# EAGLE board SPARK PCB (EAGLE 9.7.0)
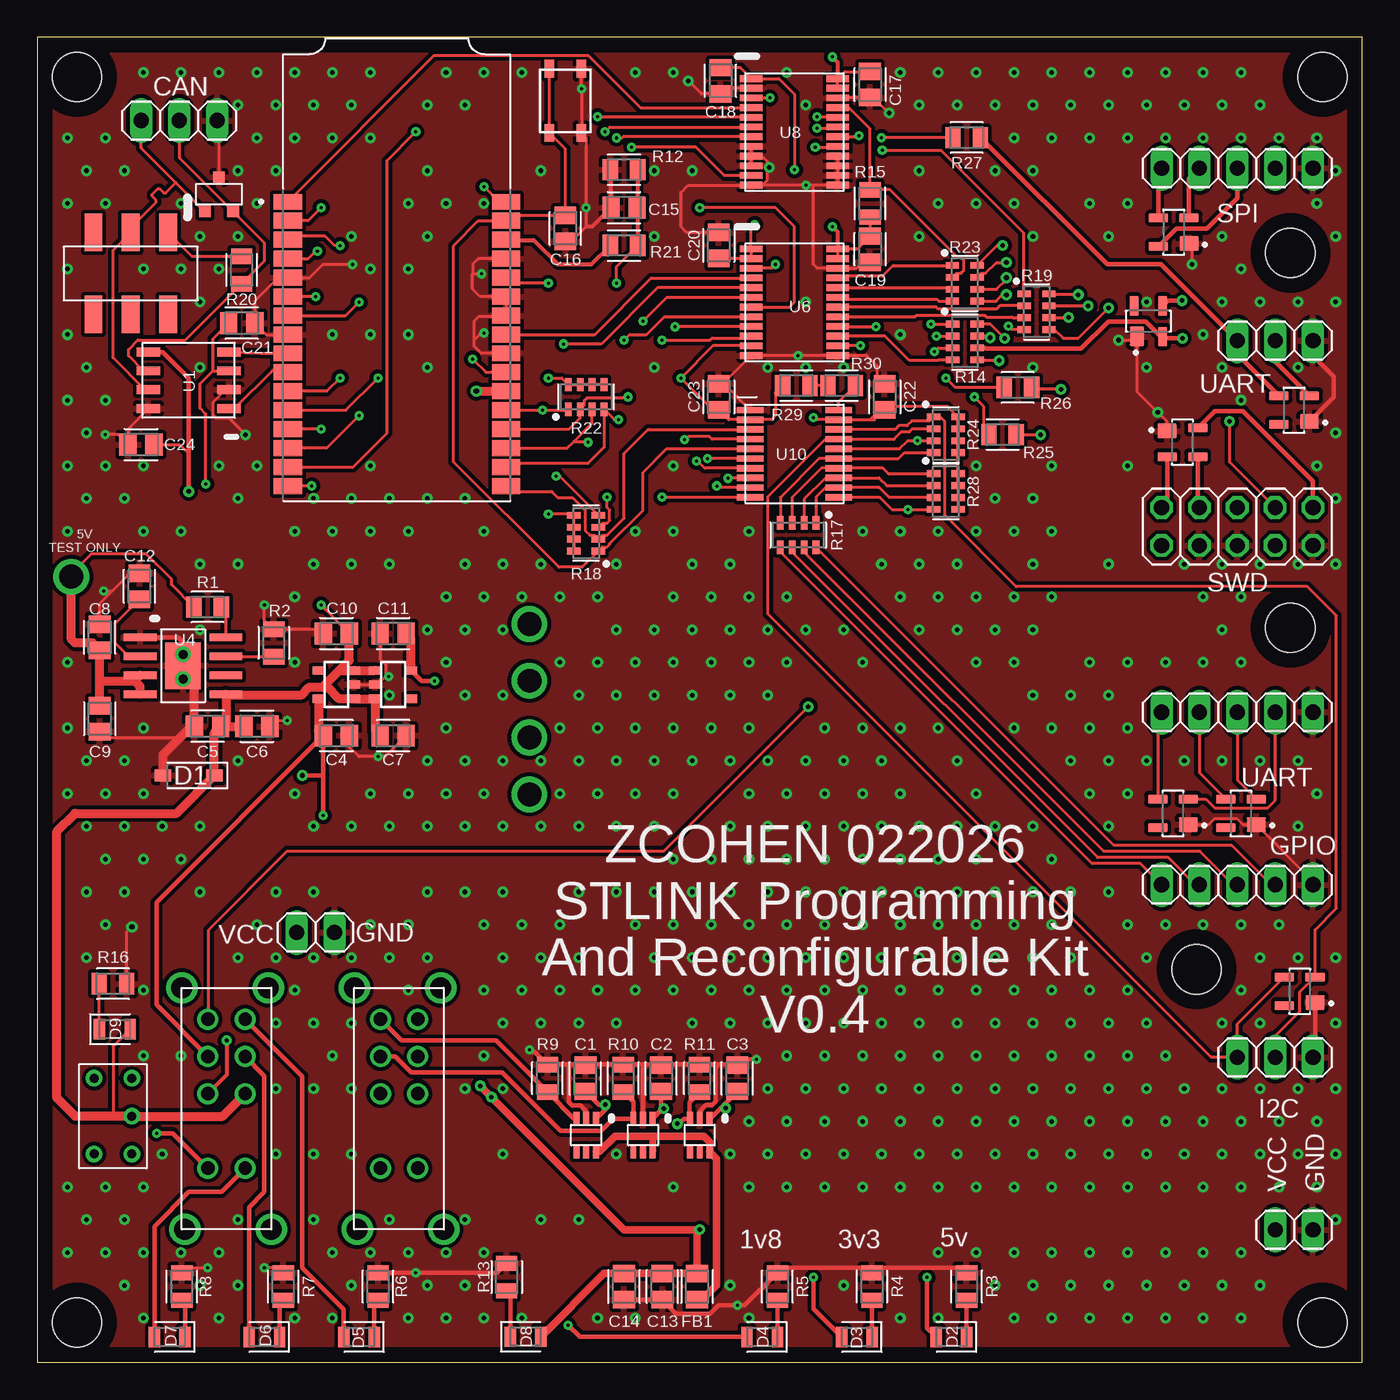
[diagram p0: board, top side]
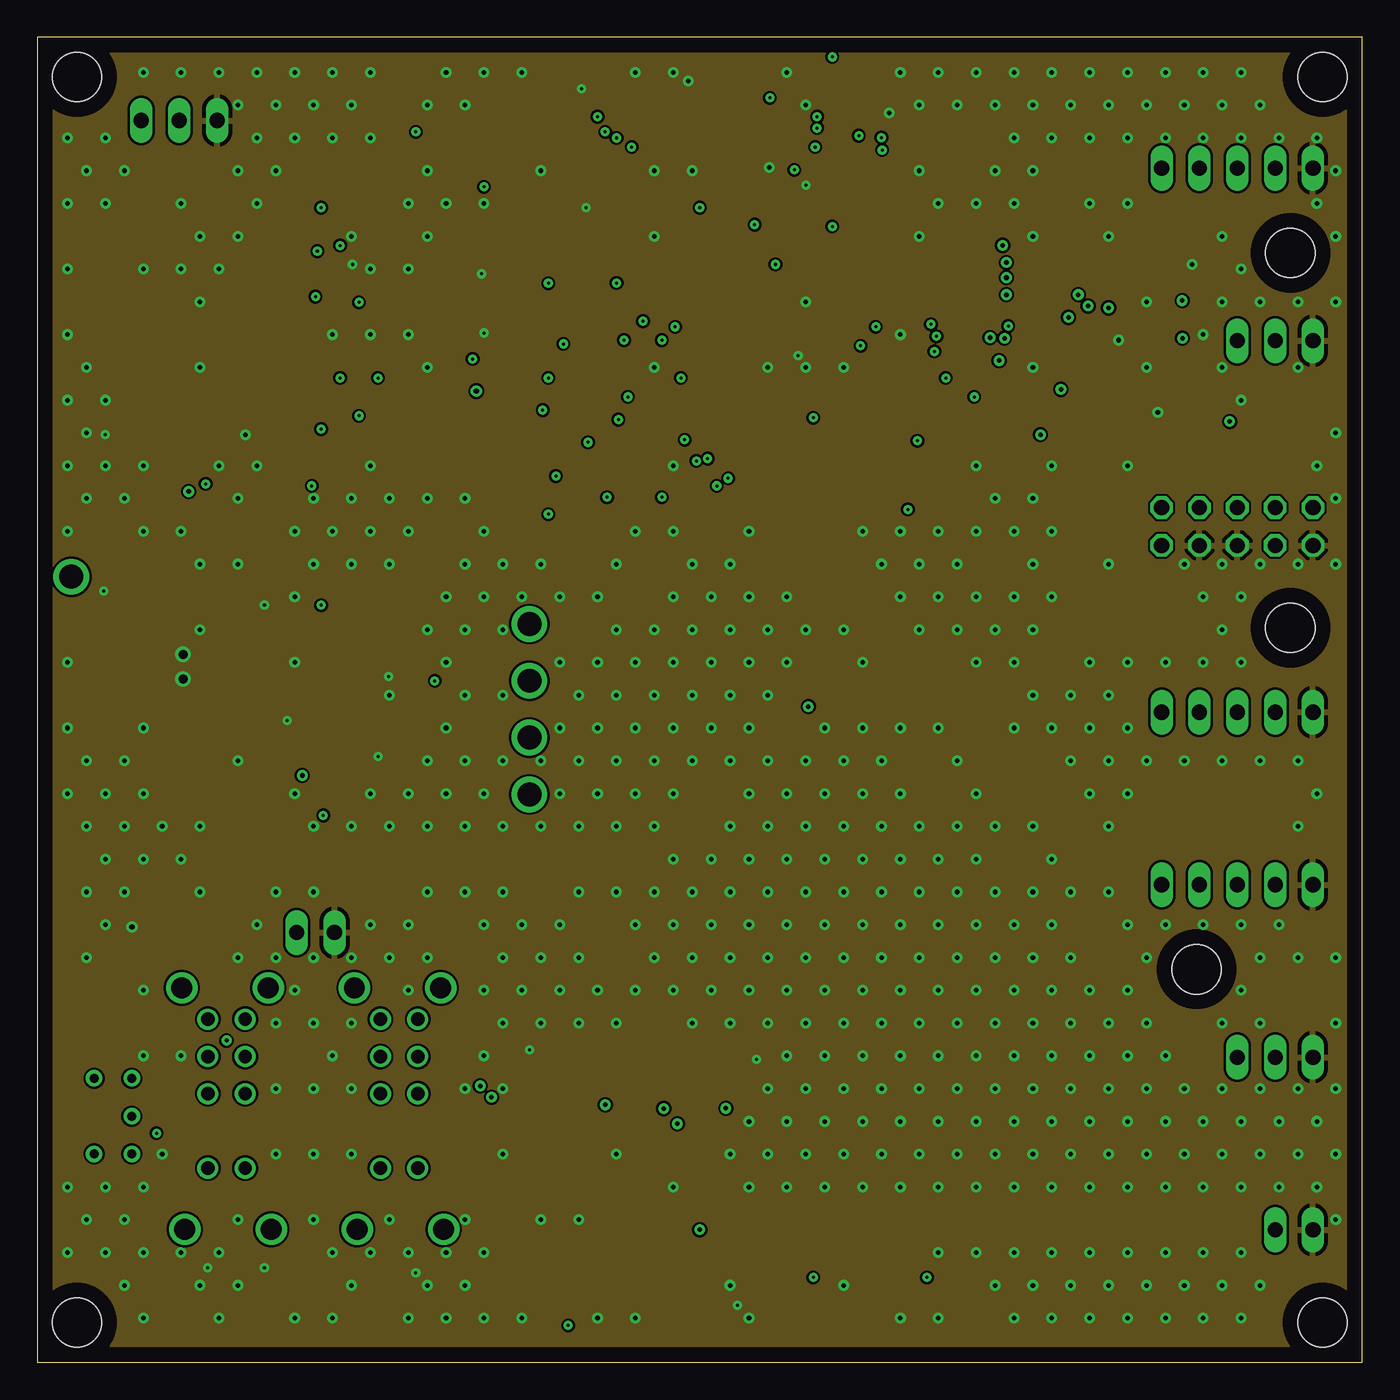
[diagram p1: board, inner layer Route2]
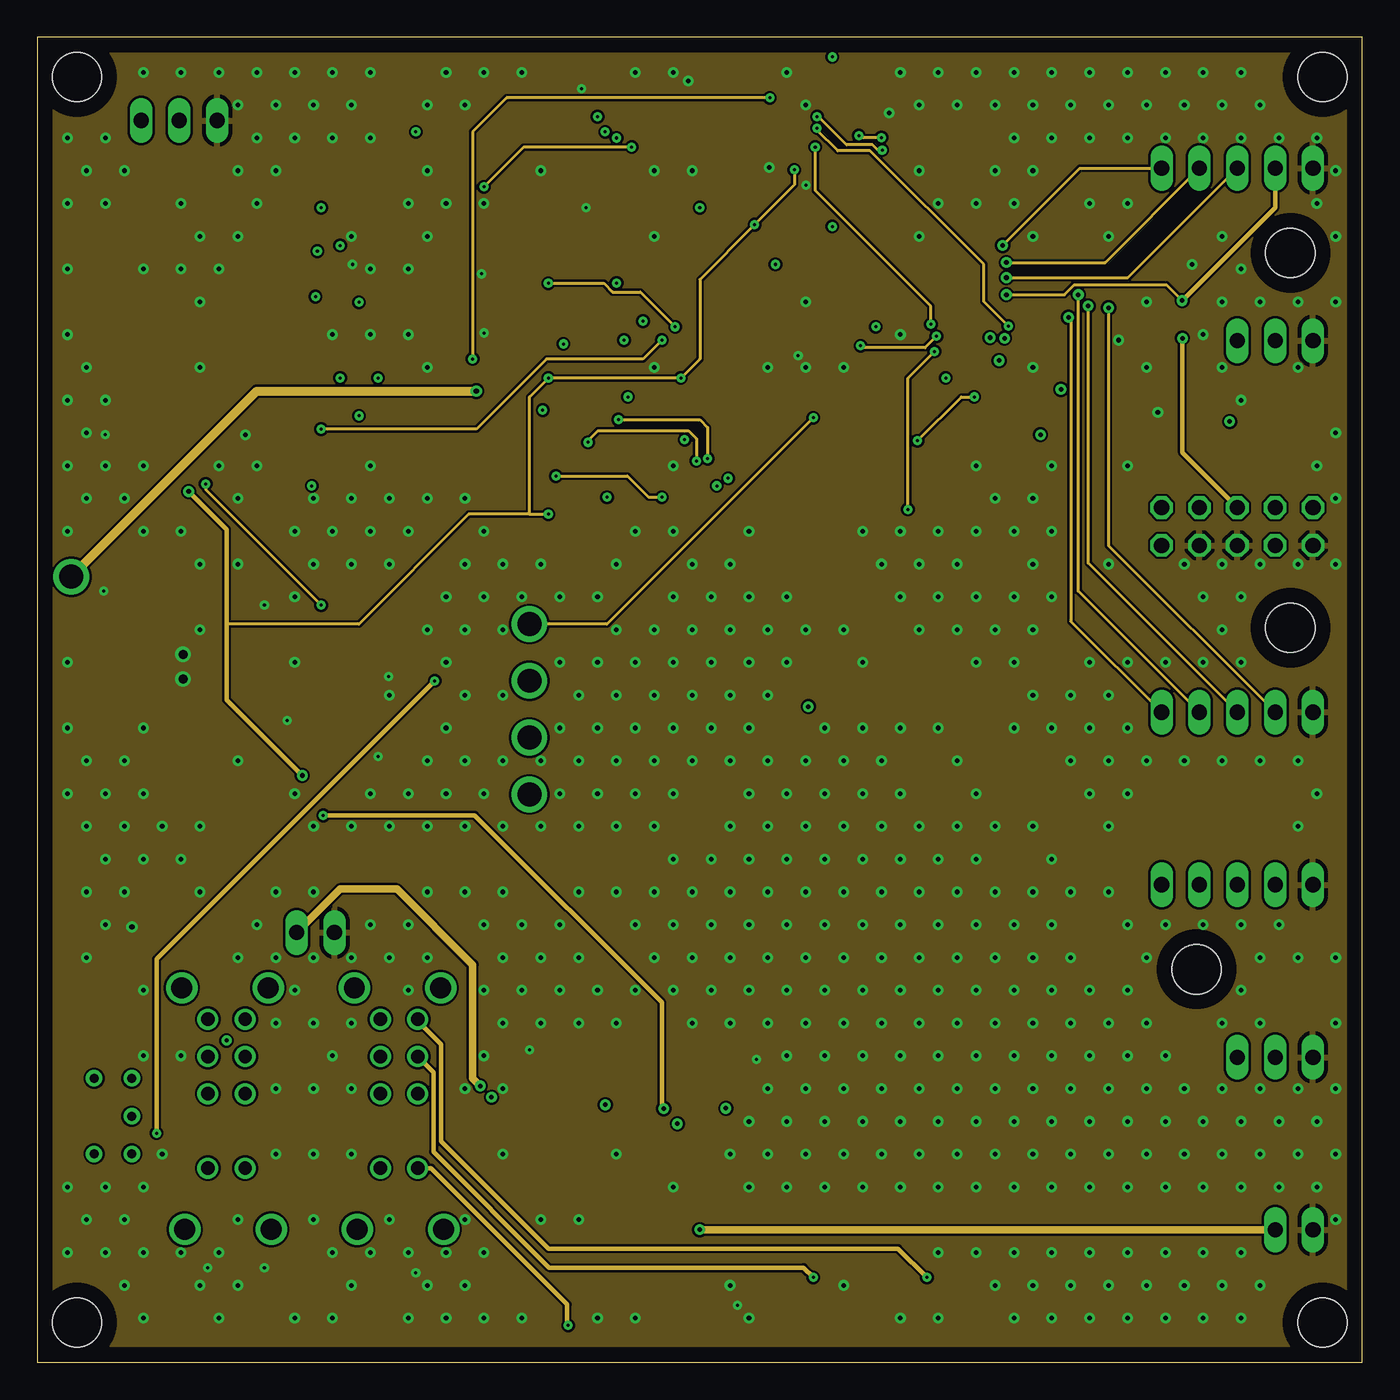
[diagram p2: board, inner layer Route63]
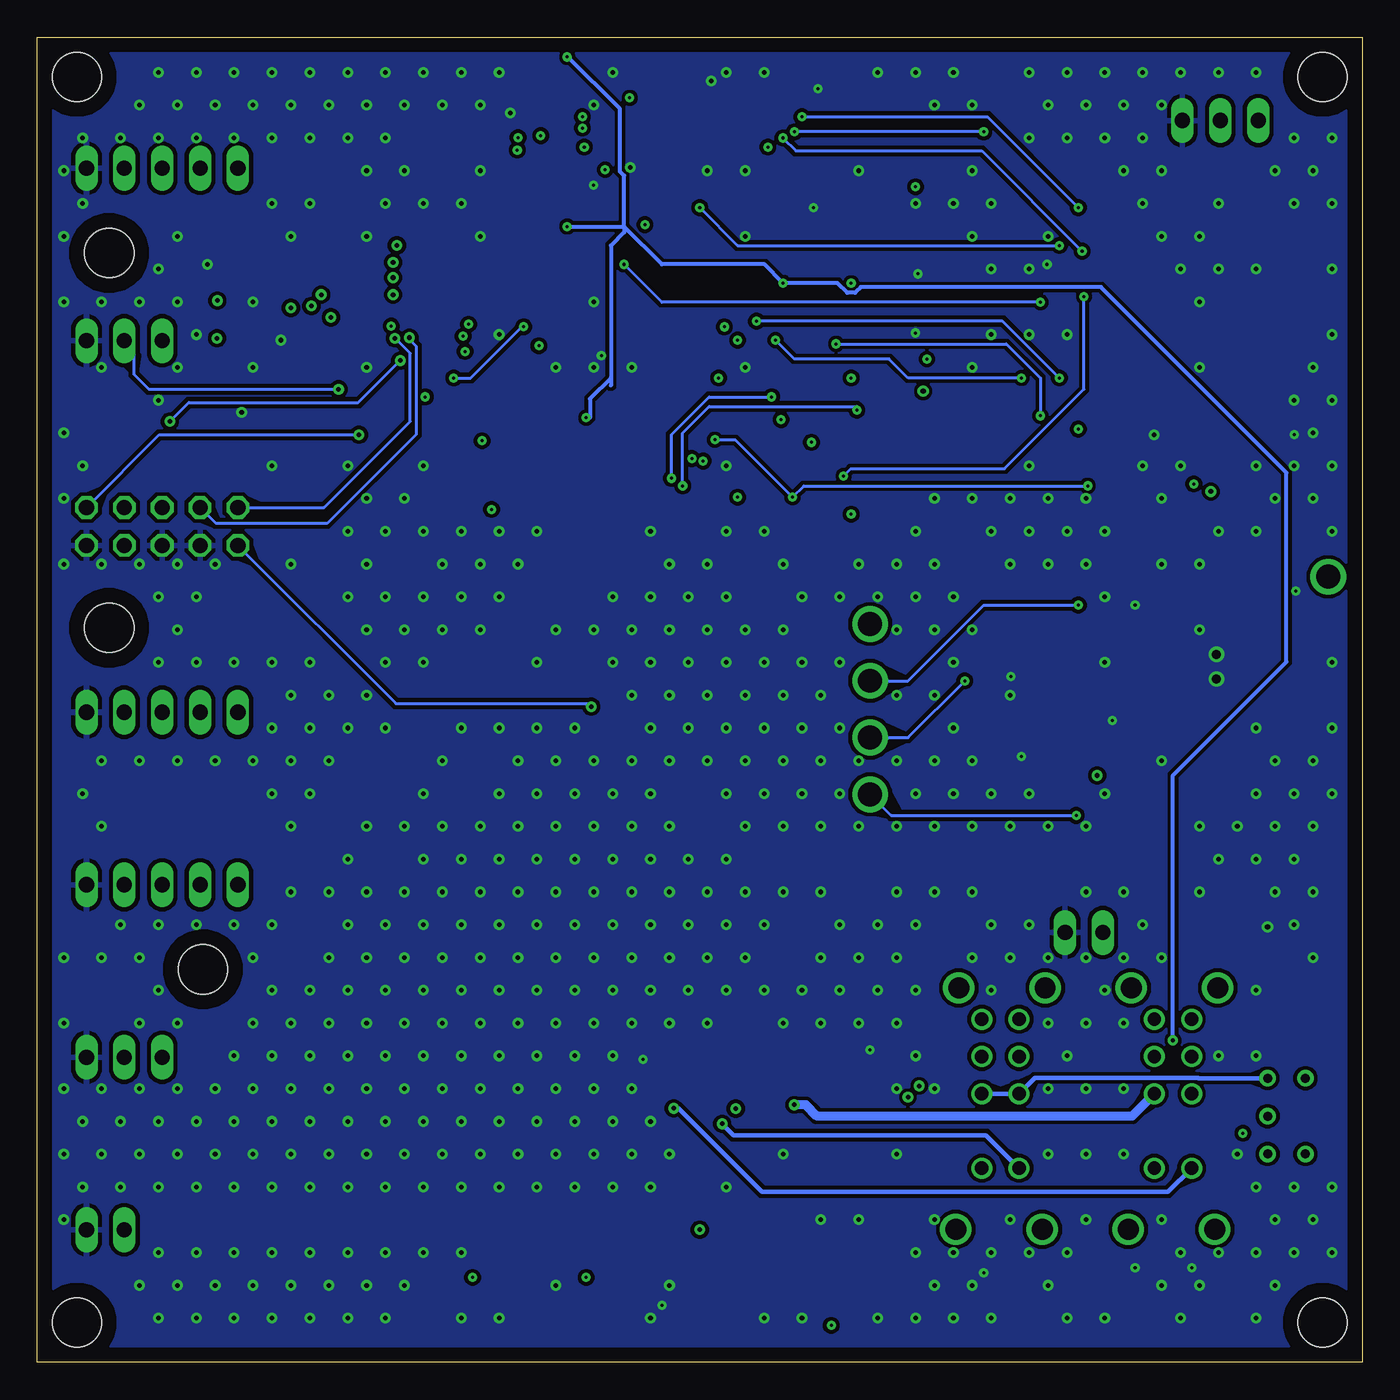
[diagram p3: board, bottom side, seen from below]

Size 88.9 x 88.9 mm. Coordinates in mm from the lower left corner, seen from the top.
Outline: 0,0 88.9,0 88.9,88.9 0,88.9 0,0
Copper layers (1+2*15+16): Top / Route2 / Route63 / Bottom
Stack-up 4 Layer Stack: Top SilkScreen Epoxy Ink / Top SolderMask SR:Green 0.0254mm Dk 4.3 / Top Surface Finish Lead-Free 0.02mm / Top CuFoil:007 0.035mm / Dielectric-1 Prepreg:001 0.064mm / Dielectric-2 Prepreg:001 0.064mm / Route2 CuFoil:007 0.035mm / Dielectric-3 Core:066 0.711mm / Route63 CuFoil:007 0.035mm / Dielectric-4 Prepreg:001 0.064mm / Dielectric-5 Prepreg:001 0.064mm / Bottom CuFoil:007 0.035mm / Bottom Surface Finish Lead-Free 0.02mm / Bottom SolderMask SR:Green 0.0254mm Dk 4.3 / Bottom SilkScreen Epoxy Ink
Design rules: minimum copper width all 6mil, minimum copper width 6mil, minimum drill size 6mil, copper clearance wire_polygon to wire_polygon 6mil, copper clearance wire_polygon to pad_smd 6mil, copper clearance wire_polygon to via 6mil, copper clearance pad_smd to pad_smd 6mil, copper clearance pad_smd to via 6mil, copper clearance via to via 6mil, copper clearance smd to pad (same net) 6mil, copper clearance smd to via (same net) 6mil, copper clearance smd to smd (same net) 6mil, dimension clearance 40mil, via restrict clearance 0mil, restrict clearance 0mil, drill distance 6mil, keepout clearance 0mil
Holes 3.3 mm at 2.67,86.23 86.23,86.23 2.67,2.67 86.23,2.67 84.07,74.42 84.07,49.28 77.79,26.36

## Footprints (pad centres in the part's own frame; a part is rotated, then mirrored left to right if it is on the bottom)
CAPC2012X110 = smd 1.165 x 1.465: 1 -0.875,0; 2 0.875,0
SOD3715X135 = smd 1.127 x 0.784: 1 -1.722,0; 2 1.722,0
LEDC2012X110N_FLAT-R = smd 0.762 x 1.362: A 1.025,0; C -1.025,0
LEDC2012X110N_FLAT-G = smd 0.762 x 1.362: A 1.025,0; C -1.025,0
BEADC2012X105N = smd 1.165 x 1.465: 1 -0.875,0; 2 0.875,0
1X03 = drill 1.016 long: 1 -2.54,0; 2 0,0; 3 2.54,0
2X05 = drill 1.016 octagon: 1 -5.08,-1.27; 2 -5.08,1.27; 3 -2.54,-1.27; 4 -2.54,1.27; 5 0,-1.27; 6 0,1.27; 7 2.54,-1.27; 8 2.54,1.27; 9 5.08,-1.27; 10 5.08,1.27
1X05 = drill 1.016 long: 1 -5.08,0; 2 -2.54,0; 3 0,0; 4 2.54,0; 5 5.08,0
1X02 = drill 1.016 long: 1 -1.27,0; 2 1.27,0
RESC2012X65 = smd 1.031 x 1.42: 1 -0.919,0; 2 0.919,0
CAY16-220J4LF = smd 0.9 x 0.45: 1 -0.825,1.2; 2 -0.825,0.4; 3 -0.825,-0.4; 4 -0.825,-1.2; 5 0.825,-1.2; 6 0.825,-0.4; 7 0.825,0.4; 8 0.825,1.2
JS202011SCQN = smd 1.2 x 2.5: 1 -2.5,-2.75; 2 0,-2.75; 3 2.5,-2.75; 4 -2.5,2.75; 5 0,2.75; 6 2.5,2.75
TCAN1051HGVDR = smd 1.55 x 0.6: CANH 2.7,0.635; CANL 2.7,-0.635; GND -2.7,0.635; RXD -2.7,-1.905; S 2.7,1.905; TXD -2.7,1.905; VCC -2.7,-0.635; VIO 2.7,-1.905
TPS22919DCKR = smd 0.9 x 0.4: GND -1.1,0; IN -1.1,0.65; NC 1.1,-0.65; ON -1.1,-0.65; OUT 1.1,0.65; QOD 1.1,0
TPS259620DDAR = smd 2.2 x 0.5: DVDT -2.875,0.635; EN -2.875,-0.635; FLT 2.875,-0.635; GND -2.875,1.905; ILM 2.875,0.635; IN -2.875,-1.905; OUT 2.875,-1.905; OVLO 2.875,1.905 | smd 2.4 x 3.1: GND1 0,0
SN74AXC8T245PWR = smd 1.5 x 0.45: A1 -2.9,2.275; A2 -2.9,1.625; A3 -2.9,0.975; A4 -2.9,0.325; A5 -2.9,-0.325; A6 -2.9,-0.975; A7 -2.9,-1.625; A8 -2.9,-2.275; B1 2.9,1.625; B2 2.9,0.975; B3 2.9,0.325; B4 2.9,-0.325; B5 2.9,-0.975; B6 2.9,-1.625; B7 2.9,-2.275; B8 2.9,-2.925; DIR1 -2.9,2.925; DIR2 -2.9,-2.925; GND -2.9,-3.575; GND2 2.9,-3.575; OE 2.9,2.275; VCCA -2.9,3.575; VCCB 2.9,2.925; VCCB1 2.9,3.575
STLINK-V3MODS = smd 1.9 x 1.07: 1 -7.32,6.604; 2 -7.32,5.334; 3 -7.32,4.064; 4 -7.32,2.794; 5 -7.32,1.524; 6 -7.32,0.254; 7 -7.32,-1.016; 8 -7.32,-2.286; 9 -7.32,-3.556; 10 -7.32,-4.826; 11 -7.32,-6.096; 12 -7.32,-7.366; 13 -7.32,-8.636; 14 -7.32,-9.906; 15 -7.32,-11.176; 16 -7.32,-12.446; 17 7.32,-12.446; 18 7.32,-11.176; 19 7.32,-9.906; 20 7.32,-8.636; 21 7.32,-7.366; 22 7.32,-6.096; 23 7.32,-4.826; 24 7.32,-3.556; 25 7.32,-2.286; 26 7.32,-1.016; 27 7.32,0.254; 28 7.32,1.524; 29 7.32,2.794; 30 7.32,4.064; 31 7.32,5.334; 32 7.32,6.604
LSF0108PW-Q100J = smd 1.78 x 0.42: A1 -2.97,1.625; A2 -2.97,0.975; A3 -2.97,0.325; A4 -2.97,-0.325; A5 -2.97,-0.975; A6 -2.97,-1.625; A7 -2.97,-2.275; A8 -2.97,-2.925; B1 2.97,1.625; B2 2.97,0.975; B3 2.97,0.325; B4 2.97,-0.325; B5 2.97,-0.975; B6 2.97,-1.625; B7 2.97,-2.275; B8 2.97,-2.925; EN 2.97,2.925; GND -2.97,2.925; REFA -2.97,2.275; REFB 2.97,2.275
GW12RCP = drill 0.6: 1 2.54,-1.27; 2 -2.54,-1.27; 4 2.54,1.27; 5 0,1.27; 6 -2.54,1.27
OS203012MU5QP1 = drill 0.9: 1 -5,1.25; 2 0,1.25; 3 2.5,1.25; 4 5,1.25; 5 -5,-1.25; 6 0,-1.25; 7 2.5,-1.25; 8 5,-1.25 | drill 1.4: P$9 -9.1,2.8; P$10 7.1,-2.8; P$11 -9.1,-3; P$12 7.1,3
AP2112K = smd 0.55 x 0.8: P$1 0.95,1.2; P$2 0,1.2; P$3 -0.95,1.2; P$4 -0.95,-1.2; P$5 0.95,-1.2
TACTILE_SWITCH = smd 1.2 x 0.65: P$1 -2.15,1.075; P$2 -2.15,-1.075; P$3 2.15,1.075; P$4 2.15,-1.075
SP0503BAHTG = smd 0.99 x 1.3: 1 -0.76,-1.025 | smd 0.59 x 1.3: 2 0.96,-1.025; 3 0.96,1.025; 4 -0.96,1.025
5011TESTPOINT = drill 1.6: P$1 0,0
SM24CANB-02HTG = smd 0.78 x 0.78: P1H -0.95,-1.145; P2L 0.95,-1.145; P3G 0,1.145

## Placement (x,y rotation side)
C1  .1uF  [CAPC2012X110]  36.78,19.05 270 top
C2  .1uF  [CAPC2012X110]  41.86,19.05 270 top
C3  .1uF  [CAPC2012X110]  46.97,19.05 270 top
C4  1uF  [CAPC2012X110]  20.07,42.04 0 top
C5  10uF  [CAPC2012X110]  11.43,42.67 0 top
C6  .1uF  [CAPC2012X110]  14.73,42.67 180 top
C7  1uF  [CAPC2012X110]  23.88,42.04 0 top
C8  .1uF  [CAPC2012X110]  4.19,48.64 270 top
C9  10uF  [CAPC2012X110]  4.19,43.18 90 top
C10  1uF  [CAPC2012X110]  20.07,48.9 180 top
C11  1uF  [CAPC2012X110]  23.88,48.9 180 top
C12  2.2nF  [CAPC2012X110]  6.86,52.07 270 top
C13  10uF  [CAPC2012X110]  41.94,5.08 270 top
C14  .1uF  [CAPC2012X110]  39.37,5.08 270 top
C15  .1uF  [CAPC2012X110]  39.37,77.47 180 top
C16  .1uF  [CAPC2012X110]  35.43,76.07 270 top
C17  .1uF  [CAPC2012X110]  55.88,85.72 270 top
C18  .1uF  [CAPC2012X110]  45.85,85.98 270 top
C19  .1uF  [CAPC2012X110]  55.88,74.68 270 top
C20  .1uF  [CAPC2012X110]  45.72,74.93 90 top
C21  .1uF  [CAPC2012X110]  13.72,69.72 0 top
C22  .1uF  [CAPC2012X110]  56.85,64.77 90 top
C23  .1uF  [CAPC2012X110]  45.72,64.77 90 top
C24  .1uF  [CAPC2012X110]  6.96,61.57 180 top
D1  SMF5.0A  [SOD3715X135]  10.16,39.37 180 top
D2  5v_LED  [LEDC2012X110N_FLAT-R]  61.34,1.7 180 top
D3  3v3_LED  [LEDC2012X110N_FLAT-R]  54.99,1.7 180 top
D4  1v8_LED  [LEDC2012X110N_FLAT-R]  48.64,1.7 180 top
D5  VCC_SENSE  [LEDC2012X110N_FLAT-R]  21.59,1.7 180 top
D6  3v3_LED  [LEDC2012X110N_FLAT-R]  15.24,1.7 180 top
D7  1v8_LED  [LEDC2012X110N_FLAT-R]  8.89,1.7 180 top
D8  VCC  [LEDC2012X110N_FLAT-G]  32.77,1.71 0 top
D9  PWR  [LEDC2012X110N_FLAT-G]  5.21,22.35 0 top
FB1  100R  [BEADC2012X105N]  44.27,5.08 90 top
JP1  CAN  [1X03]  9.53,83.31 0 top
JP2  SWD  [2X05]  80.52,56.07 0 top
JP3  SPI  [1X05]  80.52,80.11 0 top
JP4  GPIO  [1X05]  80.52,32.04 0 top
JP5  I2C  [1X03]  83.06,20.46 0 top
JP6  UART2  [1X05]  80.52,43.61 0 top
JP7  VCC  [1X02]  84.33,8.89 0 top
JP8  UART  [1X03]  83.06,68.54 0 top
JP9  VCC  [1X02]  18.67,28.83 0 top
R1  10k  [RESC2012X65]  11.43,50.67 0 top
R2  3k  [RESC2012X65]  15.88,48.26 90 top
R3  1k  [RESC2012X65]  62.36,5.08 270 top
R4  1k  [RESC2012X65]  56.01,5.08 270 top
R5  1k  [RESC2012X65]  49.66,5.08 270 top
R6  1k  [RESC2012X65]  22.86,5.08 270 top
R7  1k  [RESC2012X65]  16.51,5.08 270 top
R8  1k  [RESC2012X65]  9.7,5.08 270 top
R9  100k  [RESC2012X65]  34.23,19.05 270 top
R10  100k  [RESC2012X65]  39.32,19.05 270 top
R11  100k  [RESC2012X65]  44.43,19.05 270 top
R12  100k  [RESC2012X65]  39.37,80.01 0 top
R13  1k  [RESC2012X65]  31.5,5.71 90 top
R14  22R  [CAY16-220J4LF]  62.24,68.45 0 top
R15  10k  [RESC2012X65]  55.88,77.75 270 top
R16  1k  [RESC2012X65]  5.08,25.4 0 top
R17  22R  [CAY16-220J4LF]  51.05,55.5 270 top
R18  10k  [CAY16-220J4LF]  36.83,55.63 180 top
R19  22R  [CAY16-220J4LF]  67.05,70.48 0 top
R20  120  [RESC2012X65]  13.72,73.28 270 top
R21  220  [RESC2012X65]  39.37,74.93 180 top
R22  10k  [CAY16-220J4LF]  36.83,64.77 90 top
R23  22R  [CAY16-220J4LF]  62.23,72.39 0 top
R24  10k  [CAY16-220J4LF]  60.96,62.23 0 top
R25  22R  [RESC2012X65]  64.77,62.23 0 top
R26  22R  [RESC2012X65]  65.79,65.41 0 top
R27  22R  [RESC2012X65]  62.36,82.17 0 top
R28  10k  [CAY16-220J4LF]  60.96,58.42 0 top
R29  100k  [RESC2012X65]  50.93,65.53 180 top
R30  100k  [RESC2012X65]  53.98,65.53 180 top
S1  JS202011SCQN  [JS202011SCQN]  6.27,73.05 180 top
U1  TCAN1051HGVDRTCAN1051HGVDR  [TCAN1051HGVDR]  10.16,65.88 180 top
U2  5v  [TPS22919DCKR]  36.83,15.24 270 top
U3  3v3  [TPS22919DCKR]  40.64,15.24 270 top
U4  TPS259620DDAR  [TPS259620DDAR]  9.78,46.74 0 top
U5  1v8  [TPS22919DCKR]  44.45,15.24 270 top
U6  SN74AXC8T245PWR  [SN74AXC8T245PWR]  50.8,71.12 0 top
U7  STLINK-V3MODS  [STLINK-V3MODS]  24.13,71.25 0 top
U8  SN74AXC8T245PWR  [SN74AXC8T245PWR]  50.8,82.55 0 top
U10  LSF0108PW-Q100J  [LSF0108PW-Q100J]  50.8,60.96 0 top
U$1  GW12RCPGW12RCP  [GW12RCP]  5.08,16.51 270 top
U$2  OS203012MU5QP1  [OS203012MU5QP1]  24.27,18.02 90 top
U$3  OS203012MU5QP1  [OS203012MU5QP1]  12.7,18.02 90 top
U$4  3v3  [AP2112K]  20.07,45.47 270 top
U$5  1v8  [AP2112K]  23.88,45.47 90 top
U$6  RESET  [TACTILE_SWITCH]  35.43,84.63 270 top
U$7  SP0503BAHTG  [SP0503BAHTG]  76.25,75.82 90 top
U$8  SP0503BAHTG  [SP0503BAHTG]  80.77,36.83 90 top
U$9  5011TESTPOINT  [5011TESTPOINT]  2.29,52.7 0 top
U$10  SP0503BAHTG  [SP0503BAHTG]  76.83,61.72 270 top
U$11  SP0503BAHTG  [SP0503BAHTG]  84.71,24.89 90 top
U$12  SP0503BAHTG  [SP0503BAHTG]  76.2,36.83 90 top
U$13  5011TESTPOINT  [5011TESTPOINT]  33.02,38.1 0 top
U$14  5011TESTPOINT  [5011TESTPOINT]  33.02,41.91 0 top
U$15  5011TESTPOINT  [5011TESTPOINT]  33.02,45.72 0 top
U$16  5011TESTPOINT  [5011TESTPOINT]  33.02,49.53 0 top
U$17  SP0503BAHTG  [SP0503BAHTG]  84.33,63.88 90 top
U$18  SM24CANB-02HTG  [SM24CANB-02HTG]  12.19,78.36 0 top
U$19  SP0503BAHTG  [SP0503BAHTG]  74.55,69.85 0 top

## Library data of the parts
C1-C24 = Capacitor; CATEGORY: Capacitor; PACKAGE_SIZE: 0805; PACKAGE_TYPE: Surface Mount; SUBCATEGORY: Ceramic Capacitors; TYPE: MLCC
D1 = Diode; CATEGORY: Diode; DATASHEET: https://www.diodes.com/datasheet/download/1N4148W.pdf; DESCRIPTION: Diode 100 V 300mA Surface Mount SOD-123; FORWARD_CURRENT: 150mA; FORWARD_VOLTAGE: 1.25V; MANUFACTURER: Diodes Incorporated; MPN: 1N4148W-7-F; OPERATING_TEMPERATURE: -55°C ~ 150°C; PACKAGE_SIZE: SOD-123; PACKAGE_TYPE: Surface Mount; PART_STATUS: Active; REVERSE_VOLTAGE: 100V; ROHS: Compliant; SERIES: 1N4148; SUBCATEGORY: Rectifiers; TYPE: Small Signal Switching Diodes; ZENER_VOLTAGE: NA
D2-D7 = LED; CATEGORY: LED; COLOR: Red; DESCRIPTION: Red LED Indication 0805 (2012 Metric); PACKAGE_SIZE: 0805; PACKAGE_TYPE: Surface Mount; SUBCATEGORY: Chip LED; TYPE: Square with Flat Top
D8 D9 = LED; CATEGORY: LED; COLOR: Green; DESCRIPTION: Green LED Indication 0805 (2012 Metric); PACKAGE_SIZE: 0805; PACKAGE_TYPE: Surface Mount; SUBCATEGORY: Chip LED; TYPE: Square with Flat Top
FB1 = Filter; CATEGORY: Ferrite Bead; DESCRIPTION: Generic Ferrite Bead 0805 (2012 Metric); PACKAGE_SIZE: 0805; PACKAGE_TYPE: Surface Mount
JP1 JP5 JP8 = Connector; CATEGORY: Connectors; DESCRIPTION: Header-Straight-3 Position; PACKAGE_TYPE: Through Hole; PITCH: 0.100" (2.54mm); SUBCATEGORY: Headers; TYPE: Male Pins
JP2 = Connector; CATEGORY: Connectors; DESCRIPTION: Header-Straight-2x5 Position; PACKAGE_TYPE: Through Hole; PITCH: 0.100" (2.54mm); SUBCATEGORY: Headers; TYPE: Male Pins
JP3 JP4 JP6 = Connector; CATEGORY: Connectors; DESCRIPTION: Header-Straight-5 Position; PACKAGE_TYPE: Through Hole; PITCH: 0.100" (2.54mm); SUBCATEGORY: Headers; TYPE: Male Pins
JP7 JP9 = Connector; CATEGORY: Connectors; DESCRIPTION: Header-Straight-2 Position; PACKAGE_TYPE: Through Hole; PITCH: 0.100" (2.54mm); SUBCATEGORY: Headers; TYPE: Male Pins
R1-R13 R15 R16 R20 R21 R25-R27 R29 R30 = Resistor; CATEGORY: Resistors; DESCRIPTION: Chip Resistor 2.00 X 1.25 X 0.65 mm body 0805(2012-METRIC) Package; PACKAGE_SIZE: 0805; PACKAGE_TYPE: Surface Mount
R14 R17-R19 R22-R24 R28 = Resistors; DATASHEET: https://www.digikey.com/en/products/detail/bourns-inc/CAY16-220J4LF/2566714
S1 = Switches; DATASHEET: https://www.digikey.com/en/products/detail/c-k/JS202011SCQN/2094299
U1 = IC Devices; DATASHEET: https://www.digikey.com/en/products/detail/texas-instruments/TCAN1051HGVDR/6052107
U2-U5 U$7 U$8 U$10-U$12 U$17 U$19 = PowerComponents
U6 U8 = IC Devices; DATASHEET: https://www.digikey.com/en/products/detail/texas-instruments/SN74AXC8T245PWR/8567230?s=N4IgTCBcDaIMoDkDsAWAggDQMIA4AqYKArAAoDqIAugL5A
U7 U$4-U$6 U$9 U$13-U$16 U$18 = CohenLibrary
U10 = IC Devices; DATASHEET: https://www.digikey.com/en/products/detail/nexperia-usa-inc/LSF0108PW-Q100J/11205887
U$1-U$3 = Switches

## Nets
1V8_SW: R11.2 U5.ON U$2.1
3V3_SW: R10.2 U3.ON U$2.3
5V_PROT: C1.2 C5.2 C6.2 C7.1 C10.1 C21.1 D1.1 D9.A U1.VCC U2.IN U4.OUT U$1.5 U$3.6 U$4.P$1 U$4.P$3 U$5.P$1 U$5.P$3 U$15.P$1
5V_SW: R9.2 U2.ON U$2.4
+1.8V_RAW: C3.2 C11.1 U5.IN U$3.1 U$5.P$5 U$14.P$1
+3.3V_RAW: C2.2 C4.1 C18.1 C20.1 C23.1 C24.1 R18.5 R18.6 R18.7 R18.8 R22.5 R22.6 R22.7 R22.8 R29.2 U1.VIO U3.IN U6.DIR1 U6.DIR2 U6.VCCA U8.VCCA U10.REFA U$3.3 U$4.P$5 U$13.P$1
CAN_N: JP1.2 R20.2 U1.CANL U$18.P2L
CAN_P: JP1.1 S1.2 U1.CANH U$18.P1H
CAN_RX: U1.RXD U7.9
CAN_TX: U1.TXD U7.10
GND: C1.1 C2.1 C3.1 C4.2 C5.1 C6.1 C7.2 C8.1 C9.1 C10.2 C11.2 C12.1 C13.2 C14.2 C15.2 C16.2 C17.2 C18.2 C19.2 C20.2 C21.2 C22.2 C23.2 C24.2 D1.2 JP1.3 JP2.3 JP2.5 JP2.9 JP3.5 JP4.5 JP5.3 JP6.5 JP7.2 JP8.3 JP9.2 R2.2 R3.1 R4.1 R5.1 R6.1 R7.1 R8.1 R9.1 R10.1 R11.1 R12.1 R13.2 R16.2 U1.GND U1.S U2.GND U3.GND U4.GND U4.GND1 U5.GND U6.GND U6.GND2 U6.OE U7.5 U7.8 U7.24 U7.26 U7.27 U7.29 U8.A6 U8.A7 U8.A8 U8.B6 U8.B7 U8.B8 U8.DIR1 U8.GND U8.GND2 U8.OE U10.GND U$4.P$2 U$5.P$2 U$6.P$1 U$6.P$3 U$7.1 U$8.1 U$10.1 U$11.1 U$12.1 U$17.1 U$18.P3G U$19.1
GP0: R22.4 U7.18 U10.A4
GP0_PRO: JP4.1 R17.5
GP0_SWITCHED: R17.4 R24.4 U10.B4
GP1: R22.3 U7.19 U10.A5
GP1_PRO: JP4.2 R17.6
GP1_SWITCHED: R17.3 R28.1 U10.B5
GP2: R22.2 U7.20 U10.A6
GP2_PRO: JP4.3 R17.7
GP2_SWITCHED: R17.2 R28.2 U10.B6
GP3: R22.1 U7.21 U10.A7
GP3_PRO: JP4.4 R17.8
GP3_SWITCHED: R17.1 R28.3 U10.B7
I2C_SCL: R18.3 U7.16 U10.A2
I2C_SCL_SWITCHED: JP5.1 R24.2 U10.B2 U$11.3
I2C_SDA: R18.2 U7.17 U10.A1
I2C_SDA_SWITCHED: JP5.2 R24.1 U10.B1 U$11.2
JTAG_TDI: U6.A7 U7.28
JTAG_TDI_PRO: JP2.8 R14.5
JTAG_TDI_SWITCHED: R14.4 U6.B7
N$1: R1.2 U4.OVLO
N$2: D7.C R8.2
N$3: D6.C R7.2
N$4: D8.C R13.1
N$6: R2.1 U4.ILM
N$7: C12.2 U4.DVDT
N$8: D5.C R6.2
N$9: D5.A U$3.8
N$11: D6.A U$3.7
N$12: D7.A U$3.5
N$13: R30.1 U10.EN
N$14: D9.C R16.1
N$15: U$1.6 U$2.2 U$2.6
N$16: D4.C R5.2
N$17: D3.C R4.2
N$18: D2.C R3.2
N$19: D2.A U$2.8
N$20: D3.A U$2.7
N$21: D4.A U$2.5
N$23: R20.1 S1.1
N$24: R21.2 U7.30
N$72: R29.1 R30.2
NRST: C16.1 R18.1 U7.31 U10.A3 U$6.P$2 U$6.P$4
NRST_PRO: JP2.10 R25.2 U$10.4
NRST_SWITCHED: R24.3 R25.1 U10.B3
SPI_CLK: U6.A1 U7.7
SPI_CLK_PRO: JP3.1 R23.8 U$7.3
SPI_CLK_SWITCHED: R23.1 U6.B1
SPI_MISO: U7.23 U8.A1
SPI_MISO_PRO: JP3.2 R23.7 U$7.2
SPI_MISO_SWITCHED: R15.1 R23.2 U8.B1
SPI_MOSI: U6.A2 U7.25
SPI_MOSI_PRO: JP3.3 R23.6 U$7.4
SPI_MOSI_SWITCHED: R23.3 U6.B2
SPI_NSS: U6.A3 U7.14
SPI_NSS_PRO: JP3.4 R23.5 U$19.3
SPI_NSS_SWITCHED: R23.4 U6.B3
STLINK_5V_OUT: C8.2 C9.2 R1.1 U4.EN U4.IN U7.22 U$9.P$1
SW_DIR: U7.32 U8.DIR2
SWCLK: U6.A8 U7.13
SWCLK_PRO: JP2.4 R14.7 U$10.3
SWCLK_SWITCHED: R14.2 U6.B8
SWIDO: U7.4 U8.A5
SWIDO_PRO: JP2.2 R14.8 U$10.2
SWIDO_SWITCHED: R14.1 U8.B5
SWO: R18.4 U7.6 U10.A8
SWO_PRO: JP2.6 R14.6 U$19.2
SWO_SWITCHED: R14.3 R28.4 U10.B8
UART_CTS: U7.2 U8.A3
UART_CTS_PRO: JP6.4 R19.5 U$12.2
UART_CTS_SWITCHED: R19.4 U8.B3
UART_RTS: U6.A5 U7.3
UART_RTS_PRO: JP6.1 R19.6 U$12.3
UART_RTS_SWITCHED: R19.3 U6.B5
UART_RX: U7.1 U8.A2
UART_RX_PRO: JP6.2 R19.8 U$8.3
UART_RX_SWITCHED: R19.1 U8.B2
UART_TX: U6.A4 U7.11
UART_TX_PRO: JP6.3 R19.7 U$8.2
UART_TX_SWITCHED: R19.2 U6.B4
VCC_SENSE: JP2.1 U$3.4
VCC_TARGET: C13.1 C14.1 D8.A FB1.2 JP7.1 JP9.1
VCC_TARGET_RAW: FB1.1 U2.OUT U3.OUT U5.OUT
VCP_RX: U7.15 U8.A4
VCP_RX_PRO: JP8.1 R27.2 U$17.3
VCP_RX_SWITCHED: R27.1 U8.B4
VCP_TX: U6.A6 U7.12
VCP_TX_PRO: JP8.2 R26.2 U$17.2
VCP_TX_SWITCHED: R26.1 U6.B6
VTREF_STLINK: C15.1 C17.1 C19.1 C22.1 R12.2 R15.2 R21.1 R24.5 R24.6 R24.7 R24.8 R28.5 R28.6 R28.7 R28.8 U6.VCCB U6.VCCB1 U8.VCCB U8.VCCB1 U10.REFB U$3.2 U$16.P$1

## Tracks (layer width: path | path; a pad name or v marks a point on that pad's centre or on a via)
1V8_SW  (via drill 0.3)
  Top 0.305: R11.2 44.43,18.11 43.77,17.45 43.77,16.37 U5.ON 43.39,16.34 43.05,16 v42.95,16
  Bottom 0.305: U$2.1 25.25,15.24 42.19,15.24 v42.95,16
3V3_SW
  Top 0.305: R10.2 39.99,17.46 U3.ON 38.63,16.34 37.83,15.53 35.1,15.53 31.18,19.46 25.08,19.46 24.02,20.52 U$2.3
5V_PROT  (via drill 0.2, 0.3)
  Top 0.203: C10.1 19.3,50.53 19.3,50.67 19.18,50.8 v19.05,50.8 | v11.3,58.93 11.3,63.63 10.92,64.01 10.92,65.66 11.78,66.52 | 11.78,66.52 U1.VCC | C21.1 11.78,68.66 11.78,66.52 | D9.A 5.08,21.2 5.08,16.51
  Top 0.305: C1.2 37.68,17.27 v38.12,17.27 38.12,16.98 U2.IN
  Top 0.61: 12.7,42.67 C5.2 11.88,42.25 D1.1 9.34,36.83 2.54,36.83 1.32,35.61 1.32,17.73 2.54,16.51 5.08,16.51 U$1.5 12.44,16.51 U$3.6 | 12.7,42.67 C6.2 | U4.OUT 12.7,44.78 | 12.7,42.67 12.7,44.78 | 19.14,45.3 19.48,45.3 20.26,44.52 U$4.P$1 U$5.P$3 22.68,42.36 C7.1 | 12.7,44.78 17.74,44.78 18.26,45.3 19.14,45.3 | 20.26,46.42 U$4.P$3 U$5.P$1 | 19.14,45.3 20.26,46.42 | 20.26,46.42 20.94,47.1 C10.1
  Route63 0.203: v19.05,50.8 11.3,58.55 v11.3,58.93
  Bottom 0.203: U$15.P$1 30.48,45.72 25.4,50.8 v19.05,50.8
  Bottom 0.61: U$3.6 15.46,16.51 36.58,16.51 37.34,17.27 v38.12,17.27
5V_SW
  Top 0.305: U2.ON 36.02,16.34 R9.2 30.77,21.59 24.45,21.59 U$2.4
+1.8V_RAW  (via drill 0.2, 0.3)
  Top 0.305: U$3.1 9.1,15.37 v8,15.37 | v26.67,45.72 25.77,45.72 U$5.P$5 | 45.83,17.04 C3.2 | U5.IN 45.13,16.34 45.83,17.04 | v46.2,17.04 45.83,17.04
  Top 0.61: U$5.P$5 25.08,48.57 C11.1
  Route63 0.305: v8,15.37 8,27.05 v26.67,45.72
  Bottom 0.203: U$14.P$1 30.48,41.91 v26.67,45.72
  Bottom 0.305: U$3.1 13.04,11.43 40.26,11.43 45.87,17.04 v46.2,17.04
+3.3V_RAW  (via drill 0.2, 0.3)
  Top 0.203: v34.29,56.9 35.94,56.9 R18.5 R18.6 R18.7 R18.8 | C24.1 9.55,61.57 10.16,60.96 | R22.5 R22.6 R22.7 R22.8 35.19,66.04 v34.29,66.04 | C20.1 U6.DIR1 U6.VCCA 47.9,76.09 v48.13,76.33 | C18.1 47.17,86.85 U8.VCCA 49.77,86.12 50.8,85.09 v50.8,80.01 | U6.DIR2 45.34,68.19 v43.18,66.04 45.33,63.9 C23.1 46.38,63.23 U10.REFA 49.27,63.23 49.53,63.5 49.53,65.06 R29.2
  Top 0.305: U$3.3 8,23.97 8,30.85 C4.1 19.19,39.37 | C2.2 41.86,16.91 U3.IN 41.97,17.02 v42.04,17.02 | v19.19,36.69 19.19,39.37 | v17.78,39.37 19.19,39.37 | v10.16,58.42 10.16,60.96 10.16,66.04 8.41,67.78 U1.VIO
  Top 0.61: U$4.P$5 18.87,42.36 C4.1
  Route63 0.203: 12.7,49.53 21.59,49.53 28.96,56.9 33.02,56.9 | 33.02,56.9 v34.29,56.9 | 33.02,56.9 33.02,64.77 v34.29,66.04 v43.18,66.04 44.45,67.31 44.45,72.64 v48.13,76.33 50.8,78.99 v50.8,80.01
  Route63 0.305: v19.19,36.69 29.35,36.69 41.91,24.13 41.91,17.02 v42.04,17.02 | v17.78,39.37 12.7,44.45 12.7,49.53 12.7,55.88 v10.16,58.42
  Bottom 0.203: U$13.P$1 31.61,36.69 v19.19,36.69
CAN_N
  Top 0.203: JP1.2 9.53,80.83 U$18.P2L 15.24,75.12 15.24,73.88 R20.2 9.94,68.58 6.75,68.58 6.13,67.96 6.13,67.53 7.14,66.52 U1.CANL
CAN_P
  Top 0.203: U$18.P1H 9.3,79.15 | 9.3,79.15 6.99,81.47 JP1.1 | U1.CANH 7.43,65.28 7.19,65.28 5.08,67.39 5.08,74.61 S1.2 6.27,76.12 7.97,77.82 7.97,77.97 7.71,78.23 7.71,78.37 8.07,78.73 8.22,78.73 8.48,78.47 8.62,78.47 9.3,79.15
CAN_RX
  Top 0.203: U1.RXD 14.99,67.69 U7.9
CAN_TX
  Top 0.203: U1.TXD 13.21,63.98 15.78,66.55 16.68,66.55 U7.10
GND  (via drill 0.2, 0.3, 0.3 pad 0.61, 0.35, 0.61)
  Top 0.203: 5.02,51.75 6.22,52.95 C12.1 | C8.1 4.19,50.91 5.02,51.75 | 9.78,48.31 U4.GND1 v9.78,45.85 10.54,45.09 | 10.54,42.69 C5.1 10.34,42.67 | C9.1 4.57,41.92 9.6,41.92 | C10.2 18.91,49.18 R2.2 15.24,49.81 v15.24,50.8 | U$4.P$2 U$5.P$2 23.05,45.84 23.2,45.84 23.38,46.02 | C11.2 23,47.2 23.38,46.82 23.38,46.02 | C4.2 20.94,41.29 21.59,40.64 v22.86,40.64 23.35,40.64 C7.2 | U$18.P3G 12.19,83.19 JP1.3 | U7.8 15.35,68.96 C21.2 14.59,71.2 16.16,72.77 U7.5 18.29,72.77 19.18,73.66 v21.14,73.66 | C16.2 35.36,75.13 35.76,75.13 36.83,76.2 v36.83,77.47 36.83,82.15 U$6.P$3 v36.51,85.45 U$6.P$1 | U7.29 29.59,74.04 29.21,73.66 29.21,73.03 | U1.S 6.09,62.6 C24.2 5.43,62.23 v4.57,62.23 | R8.1 10.05,6.35 v11.43,6.35 | R7.1 16.16,6.35 v15.24,6.35 | R16.2 6,28.86 v6.35,29.21 | 29.31,68.58 29.31,68.17 29.79,67.69 U7.24 | 29.31,68.58 29.31,69.85 29.64,70.18 31.4,70.18 U7.26 U7.27 29.72,71.5 29.21,72.01 29.21,73.03 | v4.45,51.75 5.02,51.75 | U10.GND 46.07,65.64 C23.2 46,65.64 U6.GND v51.05,67.55 U6.GND2 55.65,67.55 56.39,66.8 56.39,66.11 C22.2 | U8.OE 53.73,84.85 C17.2 56.12,84.85 v57.15,83.82 | U8.DIR1 46.13,85.47 45.85,85.19 C18.2 44.56,85.1 v43.69,85.98 | 29.21,73.03 v29.82,73.03 | U8.A6 U8.A7 | U8.A7 U8.A8 | U8.A7 48.62,80.92 48.95,80.58 48.95,80.01 | 48.95,80.01 48.95,79.27 48.66,78.97 | 48.66,78.97 U8.GND 43.67,78.97 43.18,78.49 43.18,76.2 43.58,75.81 C20.2 45.33,76.2 | U8.B6 U8.B7 U8.B8 U8.GND2 52.07,78.97 | 48.66,78.97 v51.59,78.97 52.07,78.97 | 29.31,68.58 29.79,69.06 v29.99,69.06 | C19.2 55.37,73.8 54.96,73.39 U6.OE 52.34,73.39 52.07,73.66 52.07,78.97 | C6.1 15.99,43.05 v16.76,43.05 | v23.58,46.02 23.38,46.02
  Top 0.203: U$7.1 77.47,74.87 v77.47,73.66 | JP4.5 85.6,32.27 U$8.1 80.9,36.07 80.5,36.47 79,36.47 78.6,36.07 U$12.1 | v72.54,68.58 73.54,68.58 U$19.1 73.79,65.12 v75.18,63.73 75.81,63.1 U$10.1 | R4.1 55.88,6.13 55.88,6.35 | U1.GND 12.62,65.25 11.78,64.4 11.78,63.55 11.96,63.37 12.83,63.37 v13.97,62.23 | v49.12,80.17 48.95,80.01
  Top 0.254: 36.83,76.2 37.23,76.2 C15.2 38.45,77.51 R12.1
  Top 0.305: 9.78,48.31 9.45,48.64 U4.GND | 35.56,19.97 R9.1 33.38,20.83 33.15,20.83 v33.02,20.95 | 35.56,19.97 36.73,19.97 C1.1 36.82,19.97 R10.1 40.64,19.97 | 40.64,19.97 41.82,19.97 C2.1 41.91,19.97 R11.1 45.72,19.97 | 45.72,19.97 46.92,19.97 C3.1 47.36,20.32 v48.26,20.32 | U3.GND 40.64,19.97 | U5.GND 44.45,16.84 44.87,17.26 45.28,17.26 45.49,17.47 45.49,19.74 45.72,19.97 | 35.56,19.97 35.69,19.84 35.69,17.45 35.9,17.24 36.44,17.24 36.83,16.84 U2.GND | 41.91,4.21 C13.2 | C14.2 41.91,4.21 | R13.2 30.86,6 v25.4,6 R6.1 | R3.1 62.01,6.35 55.88,6.35 50.01,6.35 R5.1 47.47,3.81 v46.99,3.81 45.69,3.81 45.15,3.27 42.85,3.27 41.91,4.21 | U$11.1 85.73,20.6 JP5.3 | JP8.3 85.6,67.54 87,66.14 87,64.76 U$17.1
  Top 0.61: 10.54,42.69 10.54,45.09 | D1.2 8.44,40.77 9.6,41.92 10.34,42.67
  other vias: 9.78,47.5 74.42,71.15 84.58,71.15 79.5,71.15 51.56,71.15 10.92,71.15 82.04,71.15 87.12,71.15 9.65,73.35 7.11,2.96 27.43,2.96 47.75,2.96 68.07,2.96 80.77,73.35 78.23,2.96 17.27,2.96 37.59,2.96 57.91,2.96 24.89,73.35 12.19,2.96 32.51,2.96 73.15,2.96 12.19,73.35 24.89,2.96 65.53,2.96 22.35,73.35 2.03,73.35 75.69,2.96 7.11,73.35 29.97,2.96 70.61,2.96 80.77,2.96 19.81,2.96 40.13,2.96 60.45,2.96 13.46,75.55 66.8,5.16 46.48,5.16 26.16,5.16 5.84,5.16 76.96,5.16 82.04,5.16 21.08,5.16 79.5,75.55 59.18,75.55 71.88,5.16 10.92,5.16 64.26,5.16 87.12,75.55 66.8,75.55 26.16,75.55 74.42,5.16 54.1,5.16 13.46,5.16 41.4,75.55 21.08,75.55 69.34,5.16 28.7,5.16 71.88,75.55 10.92,75.55 79.5,5.16 60.45,77.75 68.07,7.36 27.43,7.36 7.11,7.36 70.61,77.75 29.97,77.75 9.65,77.75 78.23,7.36 85.85,77.75 65.53,77.75 24.89,77.75 4.57,77.75 62.99,7.36 22.35,7.36 2.03,7.36 14.73,77.75 73.15,7.36 12.19,7.36 62.99,77.75 2.03,77.75 65.53,7.36 24.89,7.36 4.57,7.36 73.15,77.75 75.69,7.36 70.61,7.36 29.97,7.36 9.65,7.36 27.43,77.75 80.77,7.36 60.45,7.36 19.81,7.36 33.78,79.95 13.46,79.95 87.12,9.56 5.84,9.56 64.26,79.95 43.94,79.95 3.3,79.95 36.32,9.56 59.18,79.95 16,79.95 23.62,9.56 3.3,9.56 87.12,79.95 66.8,79.95 26.16,79.95 5.84,79.95 33.78,9.56 13.46,9.56 41.4,79.95 28.7,9.56 18.54,9.56 70.61,82.15 68.07,11.76 47.75,11.76 7.11,11.76 80.77,82.15 19.81,82.15 78.23,11.76 57.91,11.76 75.69,82.15 14.73,82.15 83.31,11.76 62.99,11.76 42.67,11.76 2.03,11.76 85.85,82.15 65.53,82.15 4.57,82.15 73.15,11.76 52.83,11.76 73.15,82.15 85.85,11.76 65.53,11.76 4.57,11.76 83.31,82.15 22.35,82.15 2.03,82.15 75.69,11.76 55.37,11.76 68.07,82.15 70.61,11.76 50.29,11.76 78.23,82.15 17.27,82.15 80.77,11.76 60.45,11.76 74.42,84.35 13.46,84.35 87.12,13.96 66.8,13.96 46.48,13.96 64.26,84.35 76.96,13.96 56.64,13.96 16,13.96 69.34,84.35 28.7,84.35 82.04,13.96 61.72,13.96 21.08,13.96 79.5,84.35 59.18,84.35 18.54,84.35 71.88,13.96 51.56,13.96 31.24,13.96 76.96,84.35 16,84.35 84.58,13.96 64.26,13.96 66.8,84.35 26.16,84.35 74.42,13.96 54.1,13.96 82.04,84.35 61.72,84.35 21.08,84.35 69.34,13.96 49.02,13.96 8.38,13.96 71.88,84.35 51.56,84.35 79.5,13.96 59.18,13.96 38.86,13.96 18.54,13.96 80.77,86.55 60.45,86.55 40.13,86.55 19.81,86.55 68.07,16.16 47.75,16.16 70.61,86.55 50.29,86.55 29.97,86.55 9.65,86.55 78.23,16.16 57.91,16.16 65.53,86.55 83.31,16.16 62.99,16.16 75.69,86.55 14.73,86.55 73.15,16.16 52.83,16.16 62.99,86.55 42.67,86.55 22.35,86.55 85.85,16.16 65.53,16.16 73.15,86.55 32.51,86.55 12.19,86.55 75.69,16.16 55.37,16.16 78.23,86.55 57.91,86.55 17.27,86.55 70.61,16.16 50.29,16.16 68.07,86.55 27.43,86.55 7.11,86.55 80.77,16.16 60.45,16.16 87.12,18.36 66.8,18.36 76.96,18.36 56.64,18.36 16,18.36 82.04,18.36 61.72,18.36 21.08,18.36 71.88,18.36 51.56,18.36 31.24,18.36 84.58,18.36 64.26,18.36 74.42,18.36 54.1,18.36 69.34,18.36 49.02,18.36 28.7,18.36 79.5,18.36 59.18,18.36 18.54,18.36 68.07,20.56 7.11,20.56 57.91,20.56 62.99,20.56 73.15,20.56 52.83,20.56 65.53,20.56 75.69,20.56 55.37,20.56 70.61,20.56 50.29,20.56 29.97,20.56 9.65,20.56 60.45,20.56 19.81,20.56 87.12,22.76 66.8,22.76 46.48,22.76 56.64,22.76 36.32,22.76 16,22.76 82.04,22.76 61.72,22.76 21.08,22.76 71.88,22.76 51.56,22.76 31.24,22.76 64.26,22.76 43.94,22.76 74.42,22.76 54.1,22.76 33.78,22.76 69.34,22.76 49.02,22.76 79.5,22.76 59.18,22.76 38.86,22.76 18.54,22.76 68.07,24.96 47.75,24.96 7.11,24.96 57.91,24.96 37.59,24.96 17.27,24.96 62.99,24.96 42.67,24.96 73.15,24.96 52.83,24.96 32.51,24.96 65.53,24.96 45.21,24.96 24.89,24.96 55.37,24.96 35.05,24.96 70.61,24.96 50.29,24.96 29.97,24.96 80.77,24.96 60.45,24.96 40.13,24.96 87.12,27.16 66.8,27.16 46.48,27.16 26.16,27.16 56.64,27.16 36.32,27.16 16,27.16 82.04,27.16 61.72,27.16 41.4,27.16 21.08,27.16 51.56,27.16 31.24,27.16 84.58,27.16 64.26,27.16 43.94,27.16 23.62,27.16 3.3,27.16 74.42,27.16 54.1,27.16 33.78,27.16 13.46,27.16 69.34,27.16 49.02,27.16 59.18,27.16 18.54,27.16 68.07,29.36 47.75,29.36 78.23,29.36 57.91,29.36 83.31,29.36 62.99,29.36 42.67,29.36 22.35,29.36 73.15,29.36 52.83,29.36 32.51,29.36 65.53,29.36 45.21,29.36 24.89,29.36 4.57,29.36 75.69,29.36 55.37,29.36 35.05,29.36 14.73,29.36 50.29,29.36 29.97,29.36 80.77,29.36 60.45,29.36 40.13,29.36 41.4,31.56 61.72,31.56 51.56,31.56 31.24,31.56 10.92,31.56 71.88,31.56 46.48,31.56 26.16,31.56 5.84,31.56 66.8,31.56 36.32,31.56 16,31.56 56.64,31.56 43.94,31.56 3.3,31.56 64.26,31.56 54.1,31.56 38.86,31.56 18.54,31.56 59.18,31.56 49.02,31.56 28.7,31.56 69.34,31.56 42.67,33.76 62.99,33.76 52.83,33.76 4.57,33.76 45.21,33.76 55.37,33.76 7.11,33.76 47.75,33.76 68.07,33.76 57.91,33.76 60.45,33.76 9.65,33.76 50.29,33.76 21.08,35.96 41.4,35.96 61.72,35.96 10.92,35.96 31.24,35.96 51.56,35.96 71.88,35.96 3.3,35.96 23.62,35.96 64.26,35.96 84.58,35.96 33.78,35.96 54.1,35.96 5.84,35.96 26.16,35.96 46.48,35.96 66.8,35.96 36.32,35.96 56.64,35.96 18.54,35.96 38.86,35.96 59.18,35.96 8.38,35.96 28.7,35.96 49.02,35.96 2.03,38.16 22.35,38.16 42.67,38.16 62.99,38.16 52.83,38.16 73.15,38.16 4.57,38.16 24.89,38.16 85.85,38.16 35.05,38.16 55.37,38.16 7.11,38.16 27.43,38.16 47.75,38.16 17.27,38.16 37.59,38.16 57.91,38.16 40.13,38.16 29.97,38.16 50.29,38.16 70.61,38.16 41.4,40.36 61.72,40.36 82.04,40.36 31.24,40.36 51.56,40.36 71.88,40.36 3.3,40.36 43.94,40.36 84.58,40.36 13.46,40.36 33.78,40.36 54.1,40.36 74.42,40.36 5.84,40.36 26.16,40.36 46.48,40.36 36.32,40.36 56.64,40.36 76.96,40.36 38.86,40.36 79.5,40.36 28.7,40.36 49.02,40.36 69.34,40.36 2.03,42.56 42.67,42.56 52.83,42.56 73.15,42.56 45.21,42.56 65.53,42.56 35.05,42.56 55.37,42.56 7.11,42.56 27.43,42.56 47.75,42.56 68.07,42.56 37.59,42.56 57.91,42.56 40.13,42.56 60.45,42.56 70.61,42.56 41.4,44.75 31.24,44.75 71.88,44.75 23.62,44.75 43.94,44.75 46.48,44.75 66.8,44.75 36.32,44.75 38.86,44.75 28.7,44.75 49.02,44.75 69.34,44.75 2.03,46.95 42.67,46.95 62.99,46.95 73.15,46.95 45.21,46.95 65.53,46.95 35.05,46.95 55.37,46.95 75.69,46.95 27.43,46.95 47.75,46.95 17.27,46.95 37.59,46.95 78.23,46.95 40.13,46.95 80.77,46.95 50.29,46.95 70.61,46.95 41.4,49.15 61.72,49.15 10.92,49.15 31.24,49.15 51.56,49.15 43.94,49.15 64.26,49.15 54.1,49.15 26.16,49.15 46.48,49.15 66.8,49.15 38.86,49.15 59.18,49.15 79.5,49.15 28.7,49.15 49.02,49.15 42.67,51.35 62.99,51.35 32.51,51.35 45.21,51.35 65.53,51.35 35.05,51.35 27.43,51.35 47.75,51.35 68.07,51.35 17.27,51.35 37.59,51.35 57.91,51.35 78.23,51.35 60.45,51.35 80.77,51.35 29.97,51.35 50.29,51.35 21.08,53.55 61.72,53.55 82.04,53.55 10.92,53.55 31.24,53.55 71.88,53.55 23.62,53.55 43.94,53.55 84.58,53.55 13.46,53.55 33.78,53.55 46.48,53.55 66.8,53.55 87.12,53.55 56.64,53.55 76.96,53.55 18.54,53.55 38.86,53.55 59.18,53.55 79.5,53.55 28.7,53.55 2.03,55.75 22.35,55.75 42.67,55.75 62.99,55.75 24.89,55.75 65.53,55.75 55.37,55.75 7.11,55.75 47.75,55.75 68.07,55.75 17.27,55.75 57.91,55.75 19.81,55.75 40.13,55.75 60.45,55.75 9.65,55.75 29.97,55.75 21.08,57.95 3.3,57.95 23.62,57.95 64.26,57.95 13.46,57.95 5.84,57.95 26.16,57.95 66.8,57.95 87.12,57.95 18.54,57.95 28.7,57.95 2.03,60.15 22.35,60.15 42.67,60.15 62.99,60.15 12.19,60.15 73.15,60.15 4.57,60.15 85.85,60.15 14.73,60.15 7.11,60.15 68.07,60.15 3.3,62.35 87.12,62.35 2.03,64.55 4.57,64.55 80.77,64.55 41.4,66.75 84.58,66.75 3.3,66.75 66.8,66.75 26.16,66.75 49.02,66.75 51.56,66.75 10.92,66.75 74.42,66.75 54.1,66.75 79.5,66.75 22.35,68.95 2.03,68.95 24.89,68.95 78.23,68.95 57.91,68.95 19.81,68.95
  pour Route63: 0,88.9 88.9,88.9 88.9,0 0,0
  pour Route63 (isolate 0.254): 88.9,0 0,0 0,88.9 88.9,88.9
  pour Route2: 0,88.9 0,0 88.9,0 88.9,88.9
  pour Bottom (isolate 0.254): 0,0 0,88.9 88.9,88.9 88.9,0
  pour Top (isolate 0.254): 88.9,0 88.9,88.9 0,88.9 0,0
  pour Route63 (isolate 0.254): 88.9,0 88.9,88.9 0,88.9 0,0
GP0  (via drill 0.2)
  Top 0.203: U7.18 31.7,60.33 36.96,60.33 38.03,61.4 R22.4 38.73,63.25 v38.99,63.25 | U10.A4 45.28,60.63 v44.98,60.63
  Route63 0.203: v38.99,63.25 44.45,63.25 44.98,62.71 v44.98,60.63
GP0_PRO
  Top 0.203: R17.5 49.87,54.66 49.87,54.35 70.76,33.46 74.02,33.46 JP4.1
GP0_SWITCHED
  Top 0.203: R24.4 58.18,61.03 57.78,60.63 U10.B4 52.46,60.63 49.85,58.03 R17.4
GP1  (via drill 0.2)
  Top 0.203: U7.19 35.56,61.34 36.01,61.78 | 36.01,61.78 37.23,63.01 R22.3 | 36.01,61.78 36.89,61.78 v36.96,61.72 | v44.22,60.47 44.29,60.47 44.77,59.98 U10.A5
  Route63 0.203: v36.96,61.72 36.96,61.85 37.61,62.5 43.69,62.5 44.22,61.97 v44.22,60.47
GP1_PRO
  Top 0.203: JP4.2 77.71,32.04 75.88,33.87 71.16,33.87 50.65,54.37 R17.6
GP1_SWITCHED
  Top 0.203: R28.1 57.09,59.62 56.73,59.98 U10.B5 52.61,59.98 50.65,58.03 R17.3
GP2  (via drill 0.2)
  Top 0.203: U7.20 35.69,62.61 36.43,63.35 R22.2 36.7,64.22 36.7,64.52 36.88,64.7 39.55,64.7 v39.62,64.77 | U10.A6 46.38,59.34 v46.35,59.31
  Bottom 0.203: v46.35,59.31 46.35,62.23 43.81,64.77 v39.62,64.77
GP2_PRO
  Top 0.203: JP4.3 80.25,32.04 78.01,34.27 71.55,34.27 51.45,54.37 R17.7
GP2_SWITCHED
  Top 0.203: R28.2 57,58.82 56.49,59.34 U10.B6 52.89,59.34 51.45,57.9 R17.2
GP3  (via drill 0.2)
  Top 0.203: U7.21 v33.91,63.88 35.57,63.88 R22.1 | U10.A7 47.82,58.68 45.59,58.68 v45.59,58.8
  Bottom 0.203: v45.59,58.8 45.59,62.36 43.81,64.14 33.91,64.14 v33.91,63.88
GP3_PRO
  Top 0.203: JP4.4 82.79,32.04 80.15,34.68 72.25,34.68 R17.8
GP3_SWITCHED
  Top 0.203: R28.3 57.17,58.02 56.5,58.69 U10.B7 52.89,58.69 52.25,58.05 R17.1
I2C_SCL  (via drill 0.2)
  Top 0.203: R18.3 37.92,56.3 38.23,56.3 38.41,56.48 38.41,57.18 38.23,57.36 v38.23,58.04 | v18.41,58.8 U7.16 | U10.A2 45.28,61.94 45.09,62.12 43.68,62.12 43.45,61.9 v43.43,61.9
  Bottom 0.203: v18.41,58.8 37.47,58.8 v38.23,58.04 42.06,61.87 43.41,61.87 v43.43,61.9
I2C_SCL_SWITCHED
  Top 0.203: R24.2 58.71,62.63 58.52,62.44 57.99,62.44 57.49,61.94 U10.B2 52.89,61.94 49.02,58.07 49.02,50.21 78.77,20.46 JP5.1 80.52,22.69 U$11.3
I2C_SDA
  Top 0.203: U7.17 31.83,58.42 34.52,58.42 34.92,58.01 35.93,58.01 36.76,57.18 36.76,55.81 37.08,55.5 37.38,55.5 R18.2 37.92,55.5 38.23,55.5 39.37,56.63 39.37,60.96 40.99,62.59 U10.A1
I2C_SDA_SWITCHED
  Top 0.203: U10.B1 57.56,62.59 57.82,62.84 58.35,62.84 58.67,63.16 59.87,63.16 R24.1 60.15,63.41 60.58,63.41 60.89,63.11 60.89,56.83 65.68,52.04 85.22,52.04 87.17,50.09 87.17,30.45 85.73,29.01 U$11.2 84.69,24.81 84.69,23.52 83.06,21.88 JP5.2
JTAG_TDI  (via drill 0.2)
  Top 0.203: U6.A7 42.83,69.5 v42.8,69.47 | v34.29,72.39 31.83,72.39 U7.28
  Route63 0.203: v34.29,72.39 38.02,72.39 38.61,71.81 40.46,71.81 v42.8,69.47
JTAG_TDI_PRO  (via drill 0.3)
  Top 0.203: JP2.8 80.01,60.39 v80.01,63.12 | R14.5 63.11,67.2 v64.54,67.2
  Bottom 0.203: v80.01,63.12 78.74,64.39 67.36,64.39 v64.54,67.2
JTAG_TDI_SWITCHED
  Top 0.203: U6.B7 56.88,68.84 58.52,67.21 60.45,67.21 60.49,67.25 R14.4
N$1
  Top 0.203: R1.2 12.65,50.37 U4.OVLO
N$2
  Top 0.305: D7.C 9.91,3.95 R8.2
N$3
  Top 0.305: D6.C 16.27,3.92 R7.2
N$4
  Top 0.305: R13.1 31.74,4.55 D8.C
N$6
  Top 0.203: U4.ILM 12.68,47.34 R2.1
N$7
  Top 0.203: U4.DVDT 6.12,47.37 5.23,48.26 5.23,49.56 C12.2
N$8
  Top 0.305: D5.C 22.61,3.92 R6.2
N$9
  Top 0.305: D5.A 20.57,3.56 17.78,6.35 17.78,19.19 U$3.8
N$11
  Top 0.305: D6.A 14.21,10.4 15.24,11.43 15.24,19.23 U$3.7
N$12
  Top 0.305: D7.A 7.87,9.13 10.16,11.43 12.36,11.43 U$3.5
N$13
  Top 0.203: U10.EN 53.77,64.41 R30.1
N$14
  Top 0.203: D9.C 4.16,22.37 R16.1
N$15
  Bottom 0.305: U$1.6 10.98,19.05 11.01,19.08 21.96,19.08 U$2.2 U$2.6
N$16
  Top 0.305: R5.2 49.66,1.71 D4.C
N$17
  Top 0.305: D3.C 56.01,1.71 R4.2
N$18
  Top 0.305: D2.C 62.36,1.71 R3.2
N$19  (via drill 0.2)
  Top 0.305: D2.A 59.69,2.32 v59.69,5.69
  Route63 0.305: v59.69,5.69 57.76,7.62 34.29,7.62 27.09,14.82 27.09,21.34 25.52,22.9 U$2.8
N$20  (via drill 0.2)
  Top 0.305: D3.A 52.07,3.59 v52.07,5.69
  Route63 0.305: U$2.7 26.58,19.46 26.58,14.12 34.36,6.35 51.41,6.35 v52.07,5.69
N$21  (via drill 0.2)
  Top 0.305: D4.A 36.4,1.7 v35.63,2.47
  Route63 0.305: U$2.5 26.43,13.02 35.56,3.89 35.56,2.54 v35.63,2.47
N$23
  Top 0.203: S1.1 10.38,74.2 R20.1
N$24
  Top 0.254: U7.30 31.47,75.29 33.3,75.29 34.93,73.66 37.18,73.66 R21.2
N$72
  Top 0.203: R30.2 R29.1
NRST
  Top 0.203: U$6.P$2 U$6.P$4 35.43,81.4 C16.1 31.82,76.95 U7.31 29.59,76.58 27.94,74.93 27.94,60.4 34.99,53.34 36.57,53.34 R18.1 37.92,54.7 38.23,54.7 38.41,54.88 38.41,54.92 40.64,57.15 40.64,59.69 42.23,61.28 U10.A3
NRST_PRO  (via drill 0.3)
  Top 0.203: R25.2 v67.31,62.23
  Top 0.305: JP2.10 85.6,59.12 80.89,63.83 79.01,63.83 U$10.4
  Bottom 0.203: v67.31,62.23 80.71,62.23 JP2.10
NRST_SWITCHED  (via drill 0.2)
  Top 0.203: U10.B3 57.86,61.28 58.4,61.83 v59.05,61.83 R24.3 | R25.1 63.5,62.58 63.5,64.14 v62.87,64.77
  Route63 0.203: v59.05,61.83 61.99,64.77 v62.87,64.77
SPI_CLK  (via drill 0.2)
  Top 0.203: U7.7 20.7,70.23 v21.59,71.12 | v49.53,73.66 49.27,73.39 U6.A1
  Bottom 0.203: v21.59,71.12 46.99,71.12 v49.53,73.66
SPI_CLK_PRO  (via drill 0.3)
  Top 0.203: R23.8 64.39,74.93 v64.77,74.93
  Top 0.305: U$7.3 75.23,79.9 JP3.1
  Route63 0.203: v64.77,74.93 69.95,80.11 JP3.1
SPI_CLK_SWITCHED
  Top 0.203: U6.B1 53.82,72.86 56.69,72.86 57.41,73.59 R23.1
SPI_MISO  (via drill 0.2)
  Top 0.203: U8.A1 47.91,84.84 v49.15,84.84 | v29.21,67.31 30.1,66.42 U7.23
  Route63 0.203: v49.15,84.84 31.5,84.84 29.21,82.55 v29.21,67.31
SPI_MISO_PRO  (via drill 0.3)
  Top 0.203: R23.7 63.33,73.06 63.63,73.06 64.36,73.79 v65.02,73.79
  Top 0.305: U$7.2 77.28,79.41 JP3.2
  Route63 0.203: v65.02,73.79 71.65,73.79 JP3.2
SPI_MISO_SWITCHED
  Top 0.203: U8.B1 54.46,84.17 55.88,82.75 R15.1 57.22,78.67 61.77,74.12 61.98,74.12 62.16,73.94 62.16,73.24 61.98,73.06 61.67,73.06 R23.2
SPI_MOSI
  Top 0.203: U6.A2 41.2,72.75 37.41,68.96 U7.25
SPI_MOSI_PRO  (via drill 0.3)
  Top 0.203: R23.6 64.37,71.99 65.02,72.64 v65.02,72.77
  Top 0.305: U$7.4 76.44,76.07 78.49,76.07 80.52,78.11 JP3.3
  Route63 0.203: v65.02,72.77 73.18,72.77 JP3.3
SPI_MOSI_SWITCHED
  Top 0.203: U6.B2 61.3,72.09 R23.3
SPI_NSS  (via drill 0.2)
  Top 0.203: U6.A3 41.62,72.09 37.85,68.33 v35.31,68.33 | v21.59,63.5 19.43,61.34 U7.14
  Bottom 0.203: v21.59,63.5 21.59,66.04 23.88,68.33 v35.31,68.33
SPI_NSS_PRO  (via drill 0.3)
  Top 0.203: R23.5 64.33,71.19 64.77,71.63 v65.02,71.63
  Top 0.305: U$19.3 75.86,71.23 v76.82,71.23
  Route63 0.203: v65.02,71.63 68.92,71.63 69.58,72.29 75.76,72.29 v76.82,71.23
  Route63 0.305: JP3.4 83.06,77.47 v76.82,71.23
SPI_NSS_SWITCHED
  Top 0.203: U6.B3 53.82,71.33 60.35,71.33 60.48,71.19 R23.4
STLINK_5V_OUT  (via drill 0.35)
  Top 0.203: R1.1 9.02,52.17 9.02,52.53 7.32,54.23 3.61,54.23 2.34,52.96 2.34,52.76 U$9.P$1
  Top 0.61: v29.46,65.15 U7.22 | C9.2 4.19,45.72 | 4.19,45.72 C8.2 3.7,48.26 2.54,48.26 2.29,48.51 U$9.P$1 | 4.19,45.72 6.52,45.72 | 6.52,45.72 U4.EN | U4.IN 6.9,45.34 6.52,45.72
  Route63 0.61: U$9.P$1 14.73,65.15 v29.46,65.15
SW_DIR  (via drill 0.2)
  Top 0.203: U8.DIR2 46.1,79.62 44.2,81.53 v39.88,81.53 | v29.97,78.87 30.99,77.85 U7.32
  Route63 0.203: v39.88,81.53 32.64,81.53 v29.97,78.87
SWCLK  (via drill 0.2)
  Top 0.203: U6.A8 47.78,68.72 45.29,68.72 45.15,68.58 v41.91,68.58 | v19.05,62.61 U7.13
  Route63 0.203: v41.91,68.58 40.64,67.31 34.16,67.31 29.46,62.61 v19.05,62.61
SWCLK_PRO  (via drill 0.3)
  Top 0.203: R14.7 63.82,68.85 v63.92,68.75
  Top 0.305: U$10.3 77.86,57.46 JP2.4
  Bottom 0.203: JP2.4 76.91,56.28 69.45,56.28 63.48,62.26 63.48,68.17 63.92,68.62 v63.92,68.75
SWCLK_SWITCHED  (via drill 0.2)
  Top 0.203: R14.2 60.34,68.85 v60.33,68.83 | v55.24,68.2 U6.B8
  Route63 0.203: v60.33,68.83 59.56,68.07 55.24,68.07 v55.24,68.2
SWIDO  (via drill 0.2)
  Top 0.203: U8.A5 39.3,82.22 39.22,82.14 v38.86,82.14 | v18.8,74.55 18.67,74.55 18.16,74.04 U7.4
  Bottom 0.203: v18.8,74.55 25.53,81.28 38,81.28 v38.86,82.14
SWIDO_PRO  (via drill 0.3)
  Top 0.203: v64.9,68.71 63.95,69.65 R14.8
  Top 0.305: U$10.2 75.81,57.72 JP2.2
  Bottom 0.203: JP2.2 69.66,57.34 63.88,63.12 63.88,67.69 v64.9,68.71
SWIDO_SWITCHED  (via drill 0.2)
  Top 0.203: v52.2,81.53 53.66,81.53 U8.B5 | v59.96,69.64 59.97,69.65 R14.1
  Route63 0.203: v52.2,81.53 52.2,78.61 59.96,70.85 v59.96,69.64
SWO  (via drill 0.2)
  Top 0.203: R18.4 37.17,57.31 37.17,57.35 35.05,59.46 v34.8,59.46 | v18.67,71.5 U7.6 | v41.91,58.04 45.24,58.04 45.24,58.03 U10.A8
  Route63 0.203: v34.8,59.46 39.6,59.46 41.02,58.04 v41.91,58.04
  Bottom 0.203: v18.67,71.5 18.67,65.28 24,59.94 34.31,59.94 v34.8,59.46
SWO_PRO  (via drill 0.3)
  Top 0.305: v76.83,68.71 75.63,68.71 U$19.2 75.39,68.83 74.39,69.83 71.86,69.83 70.03,68 63.67,68 63.61,68.05 R14.6
  Route63 0.305: JP2.6 76.83,61.03 v76.83,68.71
SWO_SWITCHED  (via drill 0.2)
  Top 0.203: U10.B8 56.52,58.03 57.33,57.22 v58.42,57.22 R28.4 | v60.2,67.82 60.43,68.05 R14.3
  Route63 0.203: v58.42,57.22 58.42,66.04 v60.2,67.82
UART_CTS  (via drill 0.2)
  Top 0.203: U8.A3 37.63,83.53 v37.59,83.57 | v19.05,77.47 18.16,76.58 U7.2
  Bottom 0.203: v37.59,83.57 25.15,83.57 v19.05,77.47
UART_CTS_PRO  (via drill 0.3)
  Top 0.203: U$12.2 78.4,37.79 79,37.19 82.55,37.19 83.06,37.7 JP6.4 | R19.5 68.26,69.28 68.83,68.71 69.85,68.71 v71.88,70.74
  Route63 0.203: v71.88,70.74 71.88,54.79 JP6.4
UART_CTS_SWITCHED  (via drill 0.2)
  Top 0.203: v52.32,82.8 53.63,82.8 U8.B3 | R19.4 65.39,69.28 v65.15,69.52
  Route63 0.203: v52.32,82.8 52.32,82.68 53.72,81.28 55.88,81.28 63.5,73.66 63.5,71.17 v65.15,69.52
UART_RTS  (via drill 0.2)
  Top 0.203: U6.A5 50.48,70.8 50.8,71.12 50.8,76.2 49.53,77.47 v44.45,77.47 | v20.32,74.93 19.94,74.93 19.3,75.56 17.06,75.56 U7.3
  Bottom 0.203: v44.45,77.47 41.91,74.93 v20.32,74.93
UART_RTS_PRO  (via drill 0.3)
  Top 0.203: U$12.3 75.17,43.35 JP6.1 | R19.6 69.2,70.08 v69.2,70.1 v69.19,70.1
  Route63 0.203: JP6.1 69.34,49.71 69.34,69.95 v69.19,70.1
UART_RTS_SWITCHED
  Top 0.203: U6.B5 58.9,70.14 59.01,70.25 63.57,70.25 63.69,70.13 65.4,70.13 65.45,70.08 R19.3
UART_RX
  Top 0.203: U8.A2 40.46,84.17 36.96,87.68 26.64,87.68 U7.1
UART_RX_PRO  (via drill 0.3)
  Top 0.203: U$8.3 77.98,39.56 JP6.2 | v69.85,71.63 67.93,71.63 R19.8
  Route63 0.203: JP6.2 69.85,51.74 v69.85,71.63
UART_RX_SWITCHED  (via drill 0.2)
  Top 0.203: R19.1 66.16,71.75 66.16,75.79 60.67,81.28 56.74,81.28 v56.69,81.33 | v52.32,83.57 53.66,83.57 U8.B2
  Route63 0.203: v56.69,81.33 56.41,81.33 56.05,81.69 54.3,81.69 52.58,83.41 52.48,83.41 v52.32,83.57
UART_TX  (via drill 0.2)
  Top 0.203: U7.11 19.43,65.15 v20.32,66.04 | v40.64,69.85 42.23,71.44 U6.A4
  Bottom 0.203: v20.32,66.04 24.13,69.85 v40.64,69.85
UART_TX_PRO  (via drill 0.3)
  Top 0.203: U$8.2 80.52,39.07 JP6.3 | R19.7 67.89,70.87 v70.51,70.87
  Route63 0.203: JP6.3 70.51,53.62 v70.51,70.87
UART_TX_SWITCHED
  Top 0.203: U6.B4 60.3,70.8 60.44,70.66 64.38,70.66 64.6,70.89 R19.2
VCC_SENSE  (via drill 0.3)
  Top 0.203: U$3.4 11.51,23.07 11.51,29.02 16.78,34.29 42.04,34.29 v51.74,43.99
  Bottom 0.203: JP2.1 64.83,44.2 51.94,44.2 v51.74,43.99
VCC_TARGET  (via drill 0.3)
  Top 0.305: 44.27,8.71 v44.45,8.89
  Top 0.508: D8.A 38.03,5.96 C14.1 C13.1 FB1.2 44.27,8.71 | v44.45,8.89 39.37,8.89 v30.48,17.78 v29.72,18.54
  Route63 0.508: v44.45,8.89 JP7.1 | v29.72,18.54 29.21,19.05 29.21,26.67 24.13,31.75 20.32,31.75 JP9.1
VCC_TARGET_RAW
  Top 0.305: 41.28,15.16 41.29,15.15 | 45.13,14.17 U5.OUT
  Top 0.457: 41.29,15.15 U3.OUT | U5.OUT 45.23,14.01 45.23,13.99 | 37.73,14.14 U2.OUT
  Top 0.508: 45.23,13.99 45.57,13.65 45.57,5.17 44.61,4.21 FB1.1 | 37.73,14.14 38.76,15.16 41.28,15.16 44.72,15.16 45.13,14.75 45.13,14.17
VCP_RX  (via drill 0.2)
  Top 0.203: U7.15 21.21,60.07 23.47,62.33 23.47,80.62 v25.4,82.55 | v38.1,82.55 38.42,82.88 U8.A4
  Bottom 0.203: v25.4,82.55 v38.1,82.55
VCP_RX_PRO
  Top 0.305: U$17.3 80.52,67.63 JP8.1 75.4,73.66 71.78,73.66 R27.2
VCP_RX_SWITCHED  (via drill 0.2)
  Top 0.203: R27.1 v56.64,82.17 | U8.B4 55.05,82.22 v55.12,82.3
  Route63 0.203: v56.64,82.17 55.24,82.17 v55.12,82.3
VCP_TX  (via drill 0.2)
  Top 0.203: U7.12 20.7,63.88 v22.86,66.04 | v39.37,68.58 39.75,68.96 40.89,68.96 42.07,70.14 U6.A6
  Bottom 0.203: v22.86,66.04 30.48,66.04 31.75,67.31 38.1,67.31 v39.37,68.58
VCP_TX_PRO  (via drill 0.3)
  Top 0.203: R26.2 66.83,65.28 v68.68,65.28
  Top 0.305: U$17.2 83.06,67.14 JP8.2
  Bottom 0.203: JP8.2 82.42,67.9 82.42,66.29 81.41,65.28 v68.68,65.28
VCP_TX_SWITCHED  (via drill 0.2)
  Top 0.203: R26.1 61.59,65.41 v60.96,66.04 | U6.B6 56.24,69.5 v56.26,69.47
  Bottom 0.203: v60.96,66.04 59.82,66.04 56.38,69.47 v56.26,69.47
VTREF_STLINK  (via drill 0.2, 0.25)
  Top 0.203: 55.88,63.23 U10.REFB 52.21,63.23 v52.07,63.37 | 55.88,63.23 56.19,63.23 | U6.VCCB U6.VCCB1 55.02,74.69 C19.1 R15.2 | U8.VCCB U8.VCCB1 54.17,86.6 C17.1 | v38.86,72.42 38.86,73.5 R21.1 | R28.5 R28.6 R28.7 R28.8 R24.5 R24.6 R24.7 R24.8 61.08,64.14 57.09,64.14 C22.1 56.54,63.9 55.88,63.23
  Top 0.254: R21.1 40.29,77.43 C15.1 40.29,77.51 R12.2 | v12.7,21.59 12.7,19.27 U$3.2 | v53.34,76.2 53.7,75.84 U6.VCCB1 | v53.34,87.58 53.7,87.22 U8.VCCB1
  Route63 0.203: v52.07,63.37 38.23,49.53 U$16.P$1
  Bottom 0.254: v12.7,21.59 12.7,39.37 5.08,46.99 5.08,59.69 17.53,72.14 33.65,72.14 34.03,71.75 34.55,71.75 35.21,72.42 v38.86,72.42 40.11,73.66 46.99,73.66 49.53,76.2 | v53.34,76.2 49.53,76.2 | v53.34,87.58 53.34,87.63 49.8,84.09 49.8,79.89 49.53,79.61 49.53,76.2 | 49.53,76.2 49.53,75.82 50.42,74.93 50.42,66.04 | 50.42,66.04 50.42,65.53 | 50.42,66.04 51.82,64.64 51.82,63.37 v52.07,63.37

## Text on the board
SilkscreenTop: CAN | SPI | UART | 5V / TEST ONLY | SWD | UART | ZCOHEN 022026 / STLINK Programming / And Reconfigurable Kit / V0.4 | GPIO | VCC | GND | I2C | VCC | GND | 1v8 | 3v3 | 5v